# Altium PCB RECEPTOR.PcbDoc
Units mm, origin at the board's own origin, x right, y up, seen from the top; angles counter-clockwise.
Board outline 59.44 x 38.73 mm, 2 copper layers (Top Layer, Bottom Layer); 14 components, 10 nets, 48 pads, 0 vias.
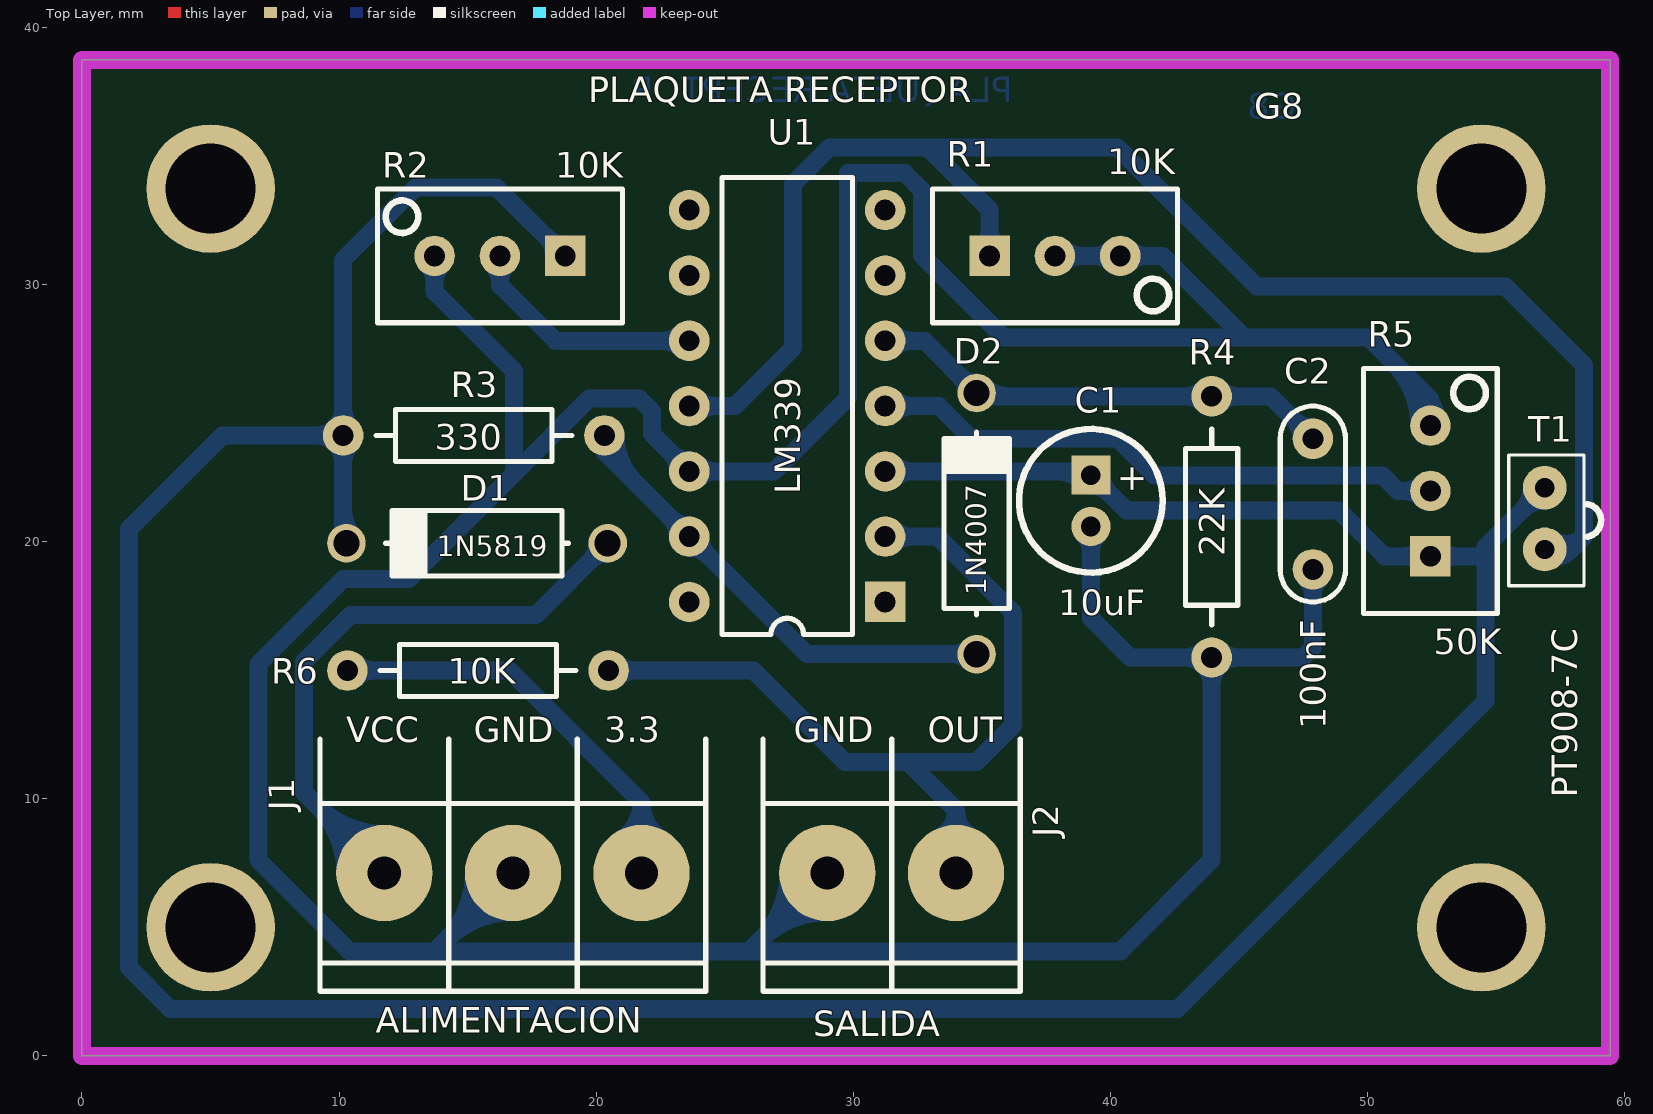
[diagram p0: Top Layer view]
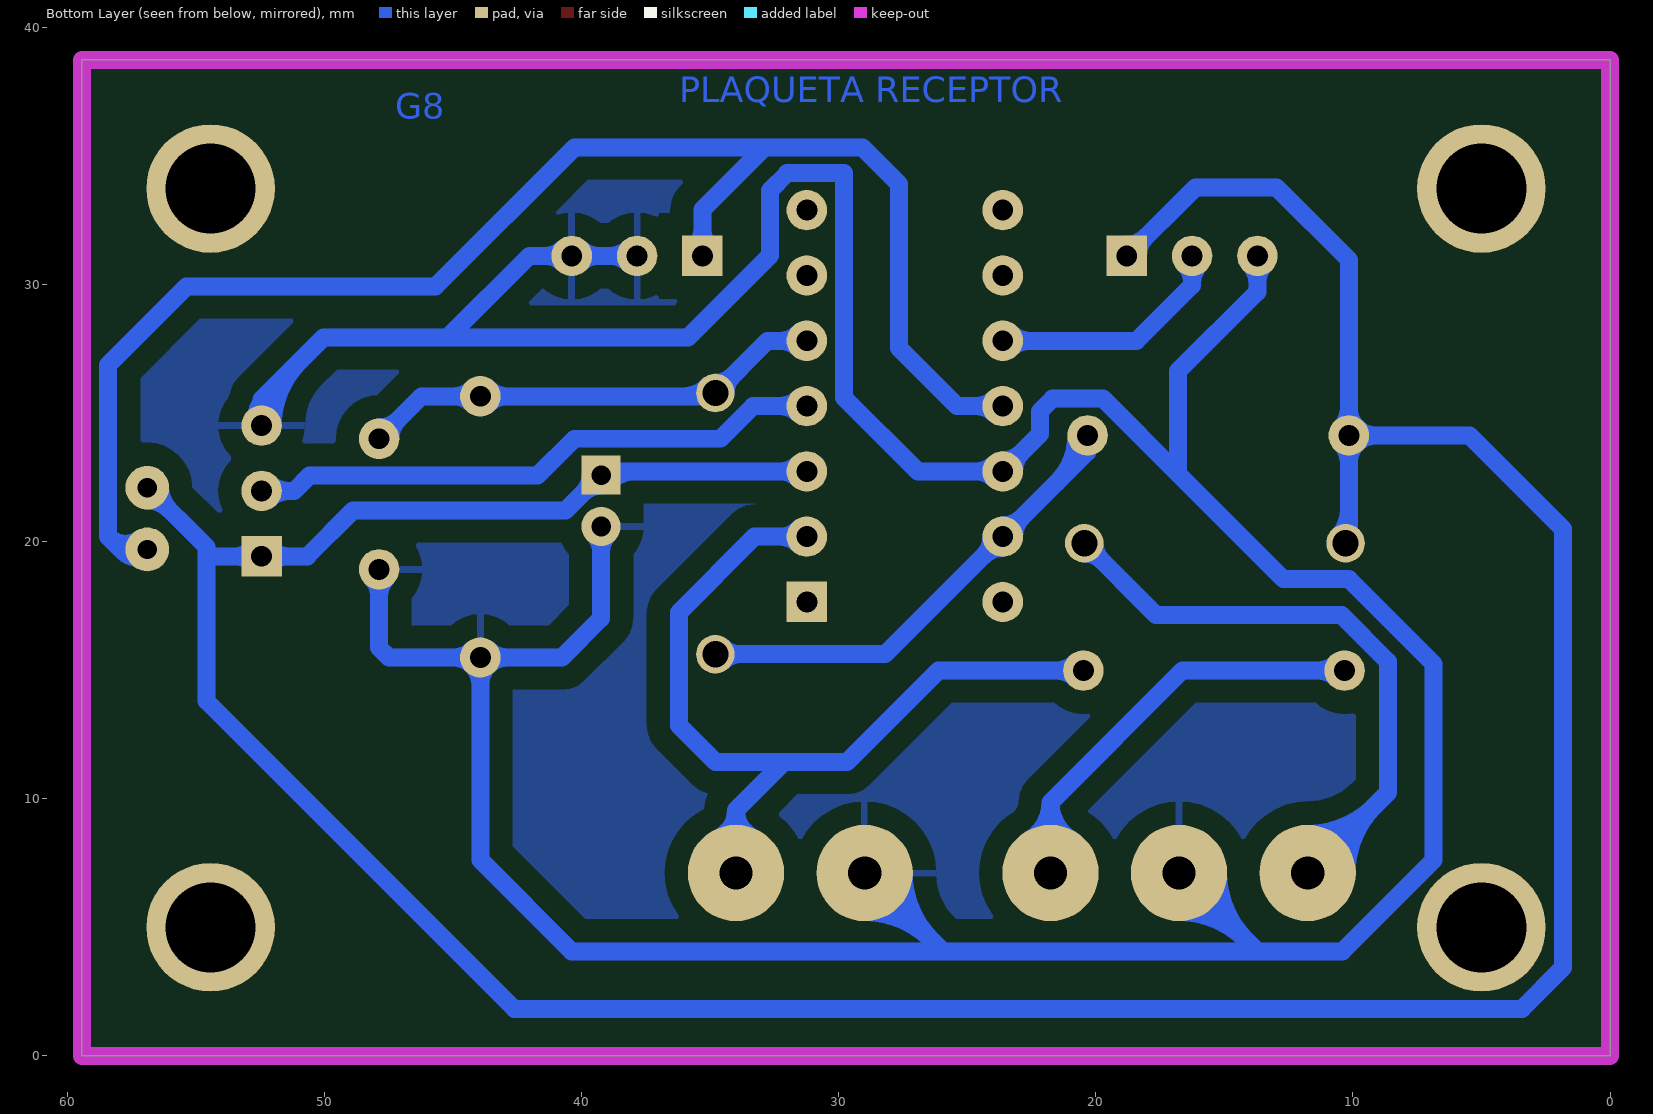
[diagram p1: Bottom Layer view, seen from below]
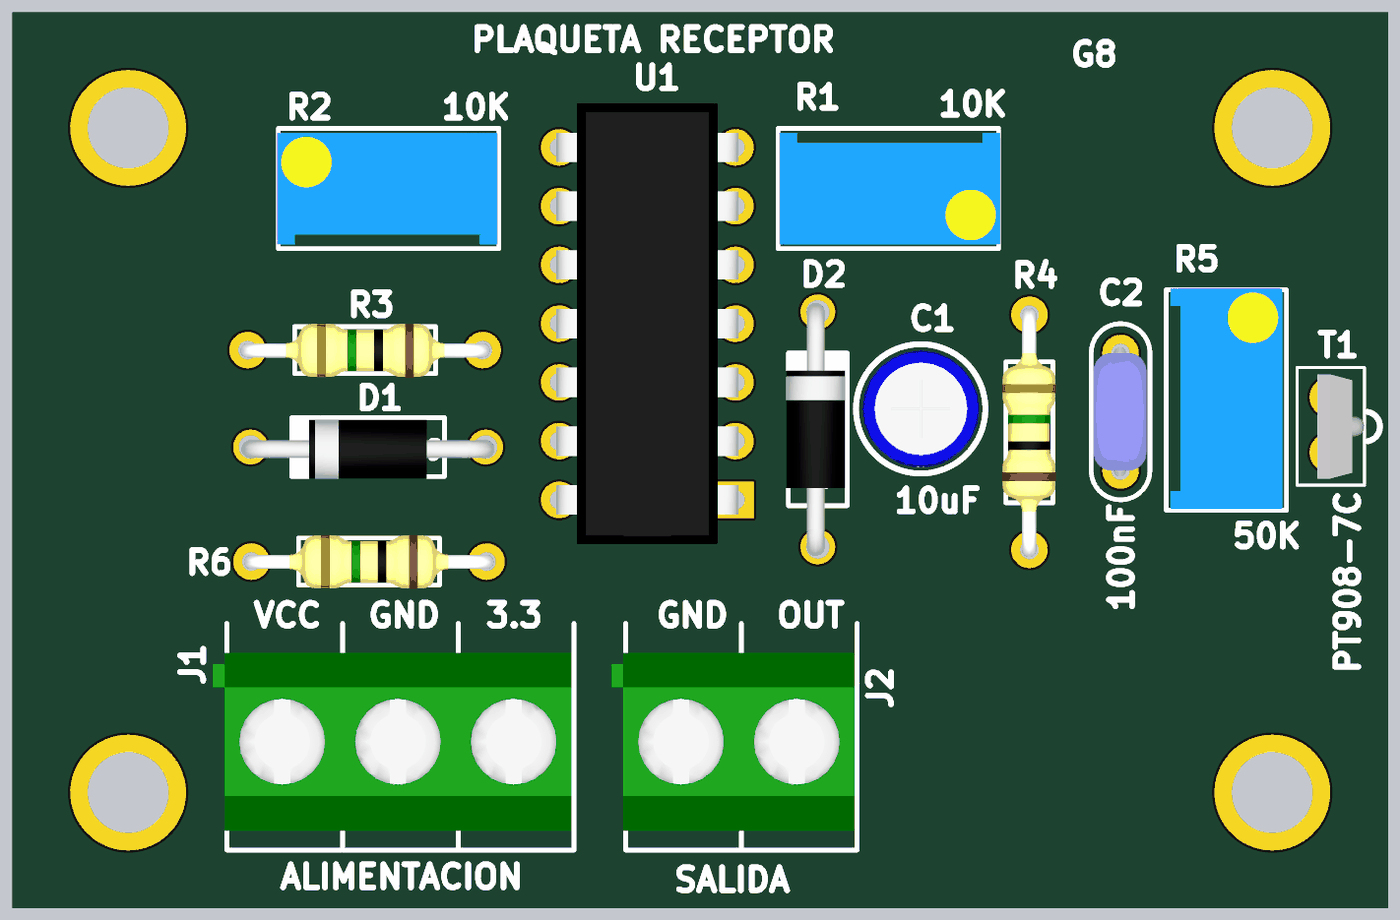
[diagram p2: 3D render of the assembled board from above, using the file's embedded part models]

## Layer stack, top to bottom
Top Layer: signal copper 0.0356
Dielectric: dielectric 0.32, FR-4, Dk 4.8
Bottom Layer: signal copper 0.0356

## Board outline
0,0 0,38.735 59.436,38.735 59.436,0

## Design rules (kind name [scope] priority, off if disabled: settings)
Clearance Polygon [InNamedPolygon('Polygon')] p1: gap=0.9
Clearance clearence [All] p2: gap=0.3
PolygonConnect [All] p1: connectstyle=Relief reliefconductorwidth=0.254 reliefentries=4 polygonreliefangle="90 Angle"
RoutingLayers [All] p1: top layer_v5=FALSE bottom layer_v5=TRUE
RoutingVias [All] p1: holewidth=0.711 width=1.27 viastyle="Through Hole" minholewidth=0.711 minwidth=1.27 maxholewidth=0.711 maxwidth=1.27
SilkscreenOverComponentPads [IsPad] p1: minsilkscreentomaskgap=0.254
SolderMaskExpansion [All] p1: expansion=0.102
Width [All] p1: maxlimit=0.7 minlimit=0.7 preferedwidth=0.7
26 further rules are at their usual default settings.

## Classes and differential pairs
component class ESQUEMATICO: C1 C2 D1 D2 J1 J2 R1 R2 R3 R4 T1 U1

## Components (designator, comment, footprint, x,y, rotation, side; value= is the part's Value field where it differs from the comment)
C1 "10uF" CAP100RP 39.243,21.59 r270 top
C2 "100nF" CAP200 47.879,21.463 r270 top
D1 "1N5819" DO41 15.367,19.939 r180 top
D2 "1N4007" DO41 34.798,20.701 r90 top
J1 "ALIMENTACION" BORNERA3 16.764,7.112 r90 top
J2 "SALIDA" BORNERA2 31.496,7.112 r90 top
R1 "10K" "PRESET V" 37.846,31.115 r0 top
R2 "10K" "PRESET V" 16.256,31.115 r180 top
R3 "330" RES400 20.32,24.13 r180 top
R4 "22K" RES400 43.942,15.494 r90 top
R5 "50K" "PRESET V" 52.451,21.971 r90 top
R6 "10K" RES400 20.484,14.986 r180 top
T1 "PT908-7C" pototransistor 56.896,22.098 r90 top
U1 "LM339" DIP14 31.242,17.653 r180 top

## Footprints (in the part's own frame and the unit in brackets; to place one, negate y for a bottom-side part, rotate by r counter-clockwise, add the part's x,y. Pads: shape width x height; smd on the part's side, far side on the other; paste and mask are expansions set on the pad)
BORNERA2 [mm] "Bornera con Tornillos 5mm separación"
  round 3.75 hole 1.3: 1(0,2.5) 2(0,-2.5)
  silkscreen extent -4.6,-5 5.2,5, body extent -3.76,-4.89 3.94,5.61, height 10
BORNERA3 [mm] "Bornera con Tornillos 5mm separación"
  round 3.75 hole 1.3: 1(0,5) 2(0,0) 3(0,-5)
  silkscreen extent -4.6,-7.5 5.2,7.5, body extent -3.76,-7.39 3.94,8.11, height 10.05
CAP100RP [mil] "Body diameter 5mm"
  rect 60x60 hole 30: 1(-39.37,0)
  round 60 hole 30: 2(39.37,0)
  silkscreen extent -110,-110 110,110, body extent -99,-99 99,100, height 454
CAP200 [mil]
  round 62 hole 32: 1(-100,0) 2(100,0)
  silkscreen extent -150,-50 150,50, body extent -110,-46 110,44, height 246
DIP14 [mil]
  rect 62x62 hole 32: 1(0,0)
  round 62 hole 32: 2(0,-100) 3(0,-200) 4(0,-300) 5(0,-400) 6(0,-500) 7(0,-600) 8(300,-600) 9(300,-500) 10(300,-400) 11(300,-300) 12(300,-200) 13(300,-100) 14(300,0)
  silkscreen extent 50,-650 250,50, body extent -5,-675 305,75, height 165
DO41 [mm]
  round 1.5 hole 1.016: 1(-5.08,0) 2(5.08,0)
  silkscreen extent -3.56,-1.27 3.56,1.27, body extent -5.46,-1.19 5.46,1.37, height 2.03
pototransistor [mm]
  round 1.7 hole 0.75: 1(-2.4,0) 2(0,0)
  silkscreen extent -3.81,-2.19 1.27,1.4, body extent -3.52,-1.52 0.98,0.51, height 3.38
"PRESET V" [mil]
  rect 62x62 hole 32: 1(-100,0)
  round 62 hole 32: 2(0,0) 3(100,0)
  silkscreen extent -188,-102 188,102, body extent -185,-95 190,95, height 455
RES400 [mil]
  round 62 hole 32: 1(0,0) 2(400,0)
  silkscreen extent 50,-40 350,40, body extent -12,-45 412,46, height 96

## Part data
C1: library part CAPPOL
C2: library part CAP
D1 D2: library part DIODO
J1: library part "BORNERA 3"
J2: library part "BORNERA 2"
R1 R2 R5: library part PRESET
R3 R4 R6: library part RES
T1: "fototransistor"
U1: "Comparador Open Collector"

## Free pads (board coordinates)
  round 5 hole 3.5: 0(54.436,5) 1(5,5) 2(5,33.735) 3(54.436,33.735)

## Nets (pads, with @x,y where several pads share a name; then routed paths per layer and width w, separated by ;. In a path a pad name is that pad's centre, name@x,y a point inside that pad or via, vN(x,y) a via of type N, cw(c..) or ccw(c..) an arc to the next point about the centre after c; other vN are vias at no path point)
3.3V: J1.3 R6.2 | length 20.6
  Bottom Layer w0.7: R6.2@10.634,14.677 cw(c11.38,13.93) 11.38,14.986 cw(c11.38,16.042) R6.2@10.634,15.295 ; 11.176,14.986 16.637,14.986 21.764,9.859 ; J1.3@20.958,8.406 ccw(c20.053,9.859) 21.764,9.859 ; J1.3 21.764,9.859 ; J1.3@22.57,8.406 cw(c23.475,9.859) 21.764,9.859
GND: C1.2 C2.2 J1.2 J2.1 R1.2 R1.3 R2.3 R4.1 R5.3 U1.12 | length 208
  Bottom Layer w0.7: R2.3@13.407,30.806 cw(c12.66,30.059) 13.716,30.059 cw(c14.772,30.059) R2.3@14.025,30.806 ; R2.3 13.716,29.718 16.8,26.634 16.8,22.642 ; J1.2@15.239,7.112 cw(c11.557,7.112) 14.161,4.509 cw(c16.764,1.905) J1.2@16.764,5.587 ; J1.2@15.939,7.112 cw(c13.947,7.112) 15.356,5.704 cw(c16.764,4.295) J1.2@16.764,6.287 ; J1.2 13.716,4.064 ; U1.12@23.185,22.733 ccw(c22.129,22.733) 22.875,23.48 ccw(c23.622,24.226) U1.12@23.622,23.17 ; U1.12@23.749,22.606 U1.12 ; U1.12@23.931,22.424 cw(c24.678,21.677) 24.678,22.733 cw(c24.678,23.789) U1.12@23.931,23.042 ; 26.055,4.171 J2.1 ; J2.1@27.471,7.112 cw(c23.789,7.112) 26.393,4.509 cw(c28.996,1.905) J2.1@28.996,5.587 ; J2.1@28.171,7.112 cw(c26.179,7.112) 27.588,5.704 cw(c28.996,4.295) J2.1@28.996,6.287 ; R1.2 R1.3 42.037,31.115 45.212,27.94 ; R1.2@38.155,30.806 cw(c38.902,30.059) 38.902,31.115 cw(c38.902,32.171) R1.2@38.155,31.424 ; C1.2@38.952,20.299 cw(c38.248,19.595) 39.243,19.595 cw(c40.238,19.595) C1.2@39.534,20.299 ; C1.2 39.243,17.018 40.767,15.494 R4.1 ; R1.3@40.077,30.806 ccw(c39.33,30.059) 39.33,31.115 ccw(c39.33,32.171) R1.3@40.077,31.424 ; R1.3@40.695,30.806 cw(c41.442,30.059) 41.442,31.115 cw(c41.442,32.171) R1.3@40.695,31.424 ; R4.1@43.633,15.803 cw(c42.886,16.55) 42.886,15.494 cw(c42.886,14.438) 43.633,15.185 cw(c42.886,14.438) 43.942,14.438 cw(c44.998,14.438) 44.251,15.185 cw(c44.998,14.438) 44.998,15.494 cw(c44.998,16.55) R4.1@44.251,15.803 ; C2.2@47.57,18.614 cw(c46.823,17.867) 47.879,17.867 cw(c48.935,17.867) C2.2@48.188,18.614 ; C2.2 47.879,15.875 47.498,15.494 R4.1 ; 50.986,26.992 cw(c48.505,24.511) R5.3@52.014,24.511 ; R5.3@52.15,24.829 ccw(c51.49,25.527) 52.451,25.527 ; 52.181,25.797 cw(c50.895,24.511) R5.3@52.714,24.511 ; R5.3 52.451,25.527 ; R5.3@52.752,24.829 cw(c53.412,25.527) 52.451,25.527 ; 13.716,4.064 40.386,4.064 43.942,7.62 R4.1 ; 13.716,4.064 10.414,4.064 6.858,7.62 6.858,15.24 10.157,18.539 12.696,18.539 16.8,22.642 ; 16.8,22.642 19.725,25.567 21.677,25.567 22.174,25.07 22.174,24.181 U1.12 ; U1.12 26.924,22.733 29.805,25.614 29.805,34.33 32.004,34.33 32.679,33.655 32.679,31.125 35.865,27.94 45.212,27.94 ; 45.212,27.94 50.038,27.94 52.451,25.527
NetC2_1: C2.1 D2.2 R4.2 U1.5 | length 27.5
  Bottom Layer w0.7: U1.5 32.766,27.813 D2.2 34.925,25.654 R4.2 46.228,25.654 C2.1 ; U1.5@31.551,27.504 cw(c32.298,26.757) 32.298,27.813 cw(c32.298,28.869) U1.5@31.551,28.122 ; D2.2@34.398,25.781 ccw(c33.432,25.781) 34.115,26.464 ccw(c34.798,27.147) D2.2@34.798,26.181 ; D2.2@35.081,26.064 ccw(c36.07,27.053) 36.07,25.654 ; R4.2@43.633,25.345 ccw(c42.886,24.598) 42.886,25.654 ccw(c42.886,26.71) R4.2@43.633,25.963 ; R4.2@44.251,25.345 cw(c44.998,24.598) 44.998,25.654 cw(c44.998,26.71) R4.2@44.251,25.963 ; C2.1@47.442,24.003 ccw(c46.386,24.003) 47.132,24.75 ccw(c47.879,25.496) C2.1@47.879,24.44
NetD1_1: D1.1 J1.1 | length 33.7
  Bottom Layer w0.7: J1.1@10.239,7.112 ccw(c6.557,7.112) 9.161,9.715 ccw(c11.764,12.319) J1.1@11.764,8.637 ; J1.1@10.939,7.112 ccw(c8.947,7.112) 10.356,8.52 ccw(c11.764,9.929) J1.1@11.764,7.937 ; J1.1 8.636,10.24 8.636,15.33 10.451,17.145 17.653,17.145 D1.1 ; D1.1@20.047,19.939 cw(c19.081,19.939) 19.764,19.256 cw(c20.447,18.573) D1.1@20.447,19.539
NetD2_1: D2.1 R3.1 U1.13 | length 25.2
  Bottom Layer w0.7: R3.1 20.32,23.495 U1.13 28.194,15.621 D2.1 ; R3.1@20.757,24.13 ccw(c23.346,24.13) 21.516,22.299 ; U1.13@23.185,20.193 ccw(c22.129,20.193) 22.875,20.94 ccw(c23.622,21.686) U1.13@23.622,20.63 ; U1.13@23.622,19.756 cw(c23.622,18.7) 24.369,19.446 cw(c25.115,20.193) U1.13@24.059,20.193 ; D2.1@34.515,15.338 ccw(c33.832,14.655) 33.832,15.621 ccw(c33.832,16.587) D2.1@34.515,15.904
NetR1_1: R1.1 T1.1 U1.11 | length 67.1
  Bottom Layer w0.7: U1.11 25.4,25.273 27.661,27.534 27.661,33.909 29.083,35.331 32.892,35.331 ; U1.11@23.931,24.964 cw(c24.678,24.217) 24.678,25.273 cw(c24.678,26.329) U1.11@23.931,25.582 ; R1.1@34.997,31.424 ccw(c34.25,32.171) 35.306,32.171 ccw(c36.362,32.171) R1.1@35.615,31.424 ; R1.1 35.306,32.917 32.892,35.331 ; T1.1@56.777,19.537 ccw(c57.264,20.198) 57.844,19.617 ; T1.1 57.925,19.698 ; T1.1@57.193,20.101 ccw(c57.753,20.86) 58.42,20.193 ; T1.1@57.289,19.389 cw(c57.925,18.889) 57.925,19.698 ; T1.1@57.289,20.007 ccw(c57.925,20.507) 57.925,19.698 ; 32.892,35.331 40.284,35.331 45.695,29.921 55.372,29.921 58.42,26.873 58.42,20.193 ; 57.925,19.698 58.42,20.193
NetR2_2: R2.2 U1.10 | length 12.7
  Bottom Layer w0.7: R2.2@15.947,30.806 cw(c15.2,30.059) 16.256,30.059 cw(c17.312,30.059) R2.2@16.565,30.806 ; R2.2 16.256,29.972 18.415,27.813 U1.10 ; U1.10@23.313,27.504 ccw(c22.566,26.757) 22.566,27.813 ccw(c22.566,28.869) U1.10@23.313,28.122
NetR5_2: R5.2 U1.4 | length 25.9
  Bottom Layer w0.7: U1.4 33.326,25.273 34.597,24.002 40.274,24.002 41.711,22.566 50.586,22.566 51.181,21.971 R5.2 ; U1.4@31.551,24.964 cw(c32.298,24.217) 32.298,25.273 cw(c32.298,26.329) U1.4@31.551,25.582 ; R5.2@52.142,21.662 ccw(c51.395,20.915) 51.395,21.971 ccw(c51.395,23.027) R5.2@52.142,22.28
SALIDA: J2.2 R6.1 U1.2 | length 38.6
  Bottom Layer w0.7: R6.1@20.794,14.677 cw(c21.54,13.93) 21.54,14.986 cw(c21.54,16.042) R6.1@20.794,15.295 ; 21.336,14.986 26.122,14.986 29.678,11.43 32.131,11.43 ; U1.2 33.274,20.193 36.22,17.247 36.22,12.852 34.798,11.43 32.131,11.43 ; U1.2@31.551,19.884 cw(c32.298,19.137) 32.298,20.193 cw(c32.298,21.249) U1.2@31.551,20.502 ; J2.2@33.321,8.48 ccw(c32.786,9.565) 33.996,9.565 ; J2.2 33.996,9.565 ; J2.2@34.671,8.48 cw(c35.206,9.565) 33.996,9.565 ; 32.131,11.43 33.996,9.565
VCC: C1.1 D1.2 R2.1 R3.2 R5.1 T1.2 U1.3 | length 158.6
  Bottom Layer w0.7: 10.16,21.211 ccw(c11.559,21.211) D1.2@10.57,20.222 ; D1.2 10.16,20.066 R3.2 ; R3.2@10.469,23.821 ccw(c11.216,23.074) 10.16,23.074 ccw(c9.104,23.074) 9.851,23.821 ccw(c9.104,23.074) 9.104,24.13 ccw(c9.104,25.186) 9.851,24.439 ccw(c9.104,25.186) 10.16,25.186 ccw(c11.216,25.186) R3.2@10.469,24.439 ; R2.1@18.359,31.115 ccw(c17.303,31.115) 18.049,31.862 ccw(c18.796,32.608) R2.1@18.796,31.552 ; R2.1 16.129,33.782 12.979,33.782 10.16,30.963 R3.2 ; U1.3 39.1,22.733 C1.1 40.624,21.209 48.895,21.209 50.673,19.431 R5.1 54.458,19.431 54.585,19.304 ; U1.3@31.551,22.424 cw(c32.298,21.677) 32.298,22.733 cw(c32.298,23.789) U1.3@31.551,23.042 ; 37.903,22.733 cw(c37.903,21.25) C1.1@38.952,22.299 ; C1.1@39.243,22.178 cw(c39.243,21.183) 39.946,21.887 cw(c40.65,22.59) C1.1@39.655,22.59 ; R5.1@52.142,19.122 ccw(c51.395,18.375) 51.395,19.431 ccw(c51.395,20.487) R5.1@52.142,19.74 ; R5.1@52.76,19.122 cw(c53.507,18.375) 53.507,19.431 cw(c53.507,20.487) R5.1@52.76,19.74 ; T1.2@56.396,22.098 cw(c55.189,22.098) 56.042,21.244 cw(c56.896,20.391) T1.2@56.896,21.598 ; T1.2 54.585,19.787 54.585,19.304 ; R3.2 5.461,24.13 1.829,20.498 1.829,3.429 3.429,1.829 42.621,1.829 54.585,13.792 54.585,19.304
pads on no net: U1.1 U1.6 U1.7 U1.8 U1.9 U1.14

## Polygon pours and split planes (outlines as drawn)
GND on Bottom Layer "Polygon" (solid, remove dead copper): 0,0 59.436,0 59.436,38.735 0,38.735

## Keep-outs
Keep-Out Layer:
  the board outline again, w0.7

## Other copper
Bottom Layer:
  text "PLAQUETA RECEPTOR" at 36.195,37.084 h1
  text "G8" at 47.244,36.449 h1

## Silkscreen, mask and mechanical layers (free items; w line width, h text height)
Top Overlay:
  text "PLAQUETA RECEPTOR" at 19.685,37.084 h1
  text "G8" at 45.593,36.449 h1
  text "VCC" at 10.287,12.192 h1
  text "GND" at 15.24,12.192 h1
  text "3.3" at 20.32,12.192 h1
  text "GND" at 27.686,12.192 h1
  text "OUT" at 32.893,12.192 h1

## Text inside footprints (layer, text, board x,y; h text height)
C1: Top Overlay "+" at 40.411,23.038 h1.02 r270